# EAGLE board linearSensor (EAGLE 7.3.0)
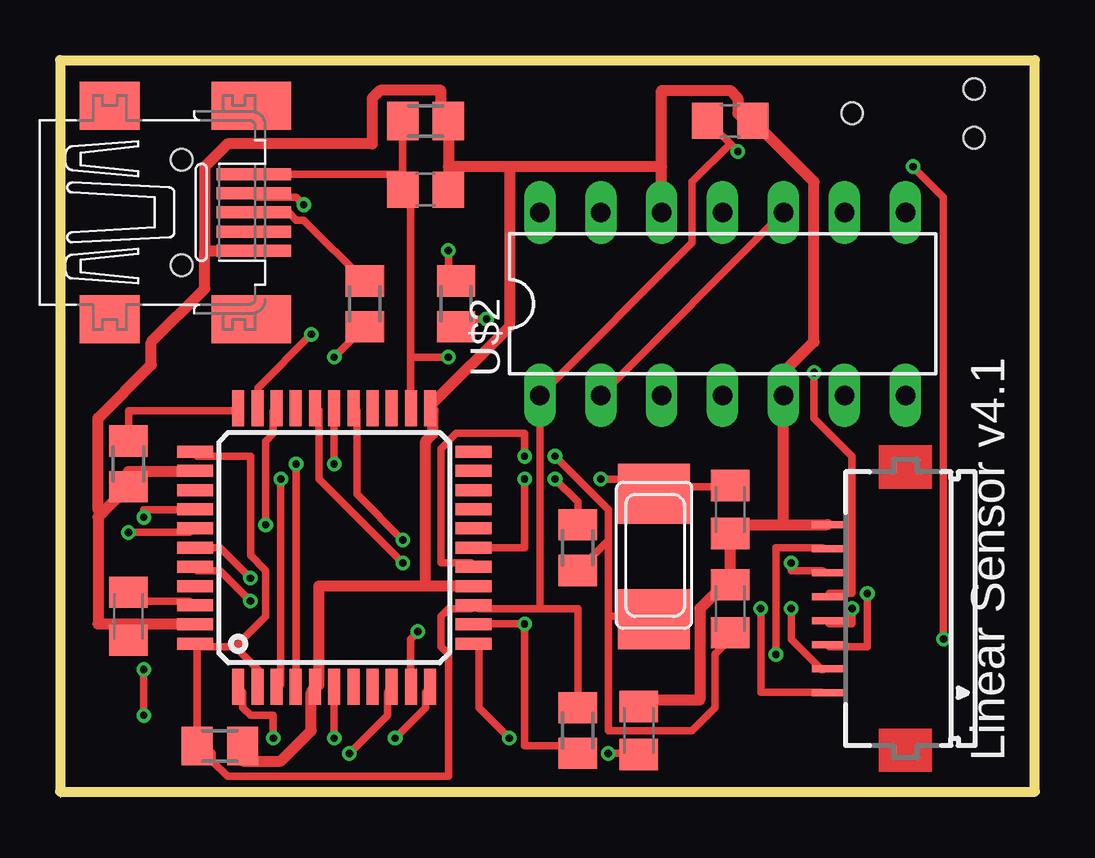
[diagram p0: board, top side]
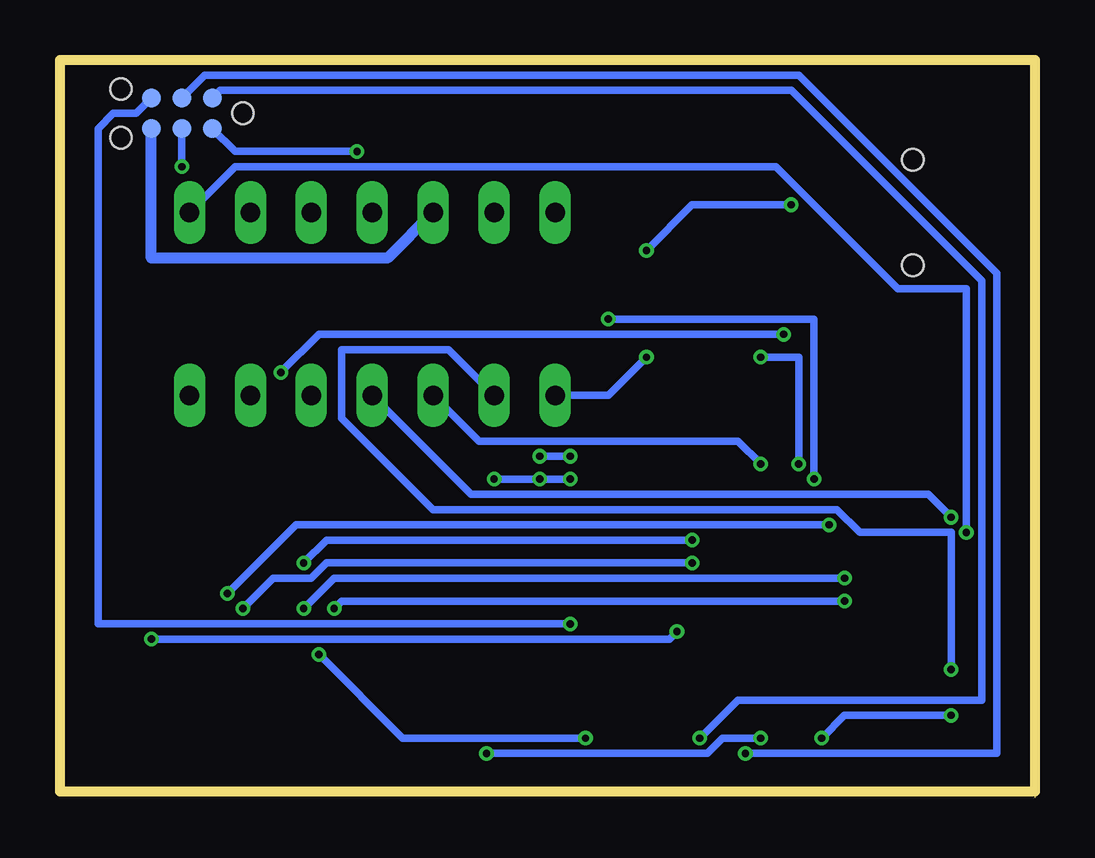
[diagram p1: board, bottom side, seen from below]

Size 40.64 x 30.73 mm. Coordinates in mm from the lower left corner, seen from the top.
Outline: 0,0.25 0,0
Outline: 0,0.25 0,30.73 40.64,30.73 40.64,0.25 0,0.25
Copper layers (1*16): Top 0.035mm / dielectric 1.5mm / Bottom 0.035mm
Design rules "Fusion_eagle_rule_v1.1": minimum track width 6mil, minimum drill 12mil, track to track 6mil, track to pad 6mil, pad to pad 6mil, via to via 6mil, smd to smd 0mil, copper to edge 10mil, drill to drill 10mil, minimum pad ring 10mil, minimum via ring 6mil, stop-mask expansion 2mil, vias tented up to drill 100mil, thermal gap 10mil
Net classes: 0 default: width 0.305 mm; 1 power: width 0.457 mm; 2 VIN: width 0.457 mm; 3 fine: width 0.305 mm; 4 aref: width 0.305 mm
vRestrict: area 3.8,2.8 to 19.1,6.6; area 3.8,2.8 to 7.6,16.8; area 15.2,5.3 to 19.1,18; area 3.8,14.2 to 19.1,18

## Footprints (pad centres in the part's own frame; a part is rotated, then mirrored left to right if it is on the bottom)
C0805K = smd 1.3 x 1.6: 1 -1,0; 2 1,0
C0805 = smd 1.3 x 1.5: 1 -0.95,0; 2 0.95,0
M0805 = smd 1.3 x 1.6: 1 -0.95,0; 2 0.95,0
TC2030-MCP-NL = smd 0.787 x 0.787: 5V 1.27,0.635; GND 3.81,0.635; MISO 1.27,-0.635; MOSI 2.54,0.635; RESET 3.81,-0.635; SCK 2.54,-0.635 | hole 0.889: 0,0; 5.08,-1.016; 5.08,1.016
DIL14 = drill 0.813 long: 1 -7.62,-3.81; 2 -5.08,-3.81; 3 -2.54,-3.81; 4 0,-3.81; 5 2.54,-3.81; 6 5.08,-3.81; 7 7.62,-3.81; 8 7.62,3.81; 9 5.08,3.81; 10 2.54,3.81; 11 0,3.81; 12 -2.54,3.81; 13 -5.08,3.81; 14 -7.62,3.81
TQFP44 = smd 1.5 x 0.5: 1 -5.8,4; 2 -5.8,3.2; 3 -5.8,2.4; 4 -5.8,1.6; 5 -5.8,0.8; 6 -5.8,0; 7 -5.8,-0.8; 8 -5.8,-1.6; 9 -5.8,-2.4; 10 -5.8,-3.2; 11 -5.8,-4; 23 5.8,-4; 24 5.8,-3.2; 25 5.8,-2.4; 26 5.8,-1.6; 27 5.8,-0.8; 28 5.8,0; 29 5.8,0.8; 30 5.8,1.6; 31 5.8,2.4; 32 5.8,3.2; 33 5.8,4 | smd 0.5 x 1.5: 12 -4,-5.8; 13 -3.2,-5.8; 14 -2.4,-5.8; 15 -1.6,-5.8; 16 -0.8,-5.8; 17 0,-5.8; 18 0.8,-5.8; 19 1.6,-5.8; 20 2.4,-5.8; 21 3.2,-5.8; 22 4,-5.8; 34 4,5.8; 35 3.2,5.8; 36 2.4,5.8; 37 1.6,5.8; 38 0.8,5.8; 39 0,5.8; 40 -0.8,5.8; 41 -1.6,5.8; 42 -2.4,5.8; 43 -3.2,5.8; 44 -4,5.8
FH12-08S-1SH = smd 0.3 x 1.3: 1 -3.5,3.25; 2 -2.5,3.25; 3 -1.5,3.25; 4 -0.5,3.25; 5 0.5,3.25; 6 1.5,3.25; 7 2.5,3.25; 8 3.5,3.25
NX6035 = smd 2.5 x 3: P$1 2.665,0; P$2 -2.565,0
32005-201 = smd 3.1 x 0.5: 1 3,1.6; 2 3,0.8; 3 3,0; 4 3,-0.8; 5 3,-1.6 | smd 2.5 x 2: M1 -3,-4.45; M2 -3,4.45 | smd 3.3 x 2: M3 2.9,4.45; M4 2.9,-4.45 | hole 0.9: 0,2.2; 0,-2.2

## Placement (x,y rotation side)
C2  22pF  [C0805K]  27.94,7.87 270 top
C3  100nF  [C0805K]  24.13,2.79 270 top
C4  100nF  [C0805]  27.94,28.19 180 top
C7  10uF  [C0805]  15.24,25.34 180 top
C8  22pF  [C0805K]  27.94,12 90 top
C10  10uF  [M0805]  15.24,28.19 180 top
C11  100nF  [C0805K]  2.86,7.56 270 top
C12  100nF  [M0805]  6.67,2.16 180 top
CON1  SPI  [TC2030-MCP-NL]  33.02,28.51 180 bottom
R3  10k  [M0805]  2.86,13.91 90 top
R13  1M  [M0805]  21.59,10.41 90 top
R15  10k  [M0805]  21.59,2.79 90 top
R24  22  [M0805]  12.7,20.57 90 top
R31  22  [M0805]  16.51,20.57 90 top
U$2  TSL1402R  [DIL14]  27.62,20.57 0 top
U$4  32U4  [TQFP44]  11.43,10.41 90 top
X1  FH12-08S-1SH  [FH12-08S-1SH]  35.24,7.87 90 top
X3  16MHz  [NX6035]  24.77,10.1 270 top
X4  MINI-USB  [32005-201]  5.08,24.38 0 top

## Library data of the parts
C2-C4 C7 C8 C10-C12 R13 R24 R31 = rcl
CON1 U$2 X3 = lpatiny
R3 R15 = resistor
U$4 = adafruit
X1 = con-hirose; OC_FARNELL: unknown; OC_NEWARK: unknown
X4 = con-cypressindustries; OC_FARNELL: unknown; OC_NEWARK: unknown

## Nets
+5V/1 [fine]: C4.2 C7.2 C10.2 C12.2 CON1.5V R15.2 U$2.1 U$4.2 U$4.14 U$4.24 U$4.34 U$4.44 X4.1
A0: U$4.36
A1: U$2.4 U$4.37
A2: U$2.8 U$4.38
A3: U$4.39 X1.2
A4: U$4.40 X1.1
A5: U$4.41
AREF: C11.1 U$4.42
CS: U$4.25
D5*: U$4.31 X1.3
D6*: U$4.27 X1.6
D7*: U$2.2 U$2.10 U$4.1
D8*: U$2.3 U$4.28
D9*: U$4.29 X1.4
D10*: U$4.30
D11*: U$4.12 X1.7
D12*: U$4.26
D13*: U$4.32 X1.5
D+USB: R24.2 X4.3
D-USB: R31.2 X4.2
GND [power]: C2.1 C3.1 C4.1 C7.1 C8.1 C10.1 C11.2 C12.1 CON1.GND R3.1 U$2.5 U$2.12 U$4.5 U$4.15 U$4.23 U$4.35 U$4.43 X1.8 X4.5
HWB: R3.2 U$4.33
MISO: CON1.MISO U$4.11
MOSI: CON1.MOSI U$4.10
N$16: C3.2 U$4.6
N$42: C8.2 R13.2 U$4.17 X3.P$2
RD+: R24.1 U$4.4
RD-: R31.1 U$4.3
RESET: CON1.RESET R15.1 U$4.13
RX: U$4.20
RXLED: U$4.8
SCK: CON1.SCK U$4.9
SCL: U$4.18
SDA: U$4.19
TX: U$4.21
TXLED: U$4.22
VUSB: U$4.7
XTAL1: C2.2 R13.1 U$4.16 X3.P$1

## Tracks (layer width: path | path; a pad name or v marks a point on that pad's centre or on a via)
+5V/1  (via drill 0.3)
  Top 0.305: 14.29,25.97 C10.2 | 14.29,25.97 C7.2 | 14.61,18.35 14.61,25.34 C7.2 | 14.61,18.35 14.61,16.45 U$4.24 | 14.29,25.97 8.26,25.97 X4.1 | 14.29,25.97 C7.2 | 7.3,6.29 8.26,5.33 8.26,4.7 U$4.2 | 5.71,6.29 7.3,6.29 | 7.3,6.29 8.57,7.56 8.57,9.46 7.94,10.1 7.94,14.22 5.71,14.22 U$4.34 | 5.71,6.29 C12.2 6.03,2.16 6.35,1.84 6.35,1.52 6.99,0.89 16.19,0.89 16.19,5.97 15.88,6.29 15.88,7.56 16.19,7.87 17.14,7.87 U$4.14 17.46,7.87 20,7.87 | 5.71,6.29 U$4.44 | 27.94,27.24 27.3,27.88 27.3,28.19 C4.2 | 27.94,27.24 v28.26,26.92 | 20,7.87 21.59,7.87 R15.2 | 20,7.87 U$2.1 26.35,23.11 26.35,25.65 27.94,27.24 | v16.19,18.35 14.61,18.35
  Bottom 0.305: CON1.5V 33.34,26.92 v28.26,26.92 | v16.19,18.35 17.78,16.76 U$2.1
A1  (via drill 0.3)
  Top 0.305: v3.49,11.68 3.49,12 5.4,12 U$4.37
  Bottom 0.305: v3.49,11.68 4.45,12.64 23.5,12.64 U$2.4
A2  (via drill 0.3)
  Top 0.305: v2.86,11.05 5.4,11.05 U$4.38
  Bottom 0.305: v2.86,11.05 2.86,21.21 5.71,21.21 10.79,26.29 33.34,26.29 U$2.8
A3  (via drill 0.3)
  Top 0.305: v30.48,7.87 30.48,6.6 31.75,5.33 X1.2 | v7.94,9.14 6.67,10.41 U$4.39
  Bottom 0.305: v30.48,7.87 29.21,9.14 v7.94,9.14
A4  (via drill 0.3)
  Top 0.305: v29.21,7.87 29.21,4.38 31.75,4.38 X1.1 | v7.94,8.19 6.67,9.46 5.71,9.46 U$4.40
  Bottom 0.305: v29.21,7.87 28.89,8.19 v7.94,8.19
AREF
  Top 0.305: C11.1 2.86,8.19 5.4,8.19 U$4.42
D5*  (via drill 0.3)
  Top 0.305: v33.66,8.51 33.66,6.29 32.07,6.29 X1.3 | v8.57,11.37 8.57,14.86 8.89,15.18 8.89,16.13 U$4.31
  Bottom 0.305: v33.66,8.51 30.8,11.37 v8.57,11.37
D6*  (via drill 0.3)
  Top 0.305: v30.48,9.78 30.48,9.46 31.75,9.46 X1.6 | v14.29,10.73 12.38,12.64 12.38,16.13 U$4.27
  Bottom 0.305: v30.48,9.78 29.53,10.73 v14.29,10.73
D7*  (via drill 0.3)
  Top 0.305: v8.89,2.48 8.89,3.43 7.94,3.43 7.62,3.75 7.62,4.38 U$4.1 | v3.49,5.33 v3.49,3.43 | U$2.2 U$2.10
  Bottom 0.305: v8.89,2.48 7.94,3.43 v3.49,3.43 | v3.49,5.33 3.49,11.05 7.3,11.05 8.26,12 25.08,12 28.89,15.81 28.89,18.67 24.45,18.67 U$2.2
D8*  (via drill 0.3)
  Top 0.305: v11.43,13.91 U$4.28
  Bottom 0.305: v11.43,13.91 12.38,14.86 23.18,14.86 U$2.3
D9*  (via drill 0.3)
  Top 0.305: v33.02,7.87 33.02,7.24 32.07,7.24 X1.4 | v14.29,9.78 10.79,13.27 10.79,16.13 U$4.29
  Bottom 0.305: v33.02,7.87 31.75,9.14 30.16,9.14 29.53,9.78 v14.29,9.78
D11*  (via drill 0.3)
  Top 0.305: v29.84,5.97 29.84,10.41 31.75,10.41 X1.7 | v18.73,2.48 17.46,3.75 17.46,6.29 U$4.12
  Bottom 0.305: v29.84,5.97 26.35,2.48 v18.73,2.48
D13*  (via drill 0.3)
  Top 0.305: v31.43,17.72 31.43,15.81 33.02,14.22 33.02,8.51 32.07,8.51 X1.5 | v10.48,19.3 8.26,17.08 8.26,16.45 U$4.32
  Bottom 0.305: v31.43,17.72 29.84,19.3 v10.48,19.3
D+USB
  Top 0.305: X4.3 9.53,24.38 9.84,24.07 10.16,24.07 R24.2
D-USB  (via drill 0.3)
  Top 0.305: v16.19,22.8 16.19,21.84 R31.2 | v10.16,24.7 9.84,25.02 8.26,25.02 X4.2
  Bottom 0.305: v16.19,22.8 14.29,24.7 v10.16,24.7
GND
  Top 0.457: 30.16,11.37 27.94,11.37 C8.1 27.94,9.14 | 30.16,11.37 31.75,11.37 X1.8 | 27.94,9.14 26.67,7.87 26.67,4.06 24.13,4.06 C3.1 | 27.94,9.14 C2.1 | 30.16,11.37 U$2.5 30.16,17.72 31.43,18.99 31.43,25.65 C4.1 28.57,28.19 28.26,28.51 28.26,29.15 27.94,29.46 25.08,29.46 25.08,26.29 | 2.86,7.24 5.4,7.24 U$4.43 | C11.2 2.86,7.24 | U$4.35 5.4,13.59 2.86,13.59 R3.1 1.75,11.84 | 2.86,7.24 1.59,7.24 1.59,11.68 1.75,11.84 | 6.03,22.8 7.94,22.8 X4.5 | 6.03,22.8 6.03,21.21 3.81,18.99 3.81,18.03 1.59,15.81 1.59,12 1.75,11.84 | C12.1 7.62,1.52 9.21,1.52 10.48,2.79 10.48,4.38 U$4.5 10.79,4.7 10.79,8.83 15.24,8.83 | 15.24,8.83 17.14,8.83 U$4.15 | 15.24,8.83 15.24,14.86 15.56,15.18 15.56,16.13 U$4.23 15.56,16.45 18.73,19.62 18.73,26.29 | 16.19,26.29 C10.1 15.88,28.19 15.88,29.46 13.34,29.46 13.02,29.15 13.02,27.24 6.99,27.24 6.03,26.29 6.03,22.8 | 16.19,26.29 C7.1 | 25.08,26.29 18.73,26.29 | 18.73,26.29 16.19,26.29 | U$2.12 25.08,26.29
  Bottom 0.457: CON1.GND 36.83,22.48 26.99,22.48 U$2.12
HWB
  Top 0.305: R3.2 2.86,16.13 7.3,16.13 U$4.33
MISO  (via drill 0.3)
  Top 0.305: v13.97,2.48 15.24,3.75 15.24,4.38 U$4.11
  Bottom 0.305: CON1.MISO 33.97,29.46 10.16,29.46 2.22,21.53 2.22,4.06 12.38,4.06 v13.97,2.48
MOSI  (via drill 0.3)
  Top 0.305: v35.56,26.29 36.83,25.02 v36.83,6.6 | v14.92,6.92 14.61,6.6 14.61,4.7 U$4.10
  Bottom 0.305: v35.56,26.29 CON1.MOSI | v36.83,6.6 15.24,6.6 v14.92,6.92
N$16  (via drill 0.3)
  Top 0.305: v11.43,2.48 U$4.6 | v22.86,1.84 24.13,1.84 C3.2
  Bottom 0.305: v11.43,2.48 13.02,2.48 13.65,1.84 v22.86,1.84
N$42  (via drill 0.3)
  Top 0.305: U$4.17 19.37,10.41 v19.37,13.27 | v20.64,13.27 21.59,12.32 R13.2 | 24.77,12.95 27.94,12.95 C8.2 | v22.54,13.27 24.77,13.27 24.77,12.95 | 24.77,12.95 X3.P$2
  Bottom 0.305: v19.37,13.27 v20.64,13.27 v22.54,13.27
RD+  (via drill 0.3)
  Top 0.305: v9.84,13.91 9.84,4.7 U$4.4 | v11.43,18.35 R24.1
  Bottom 0.305: v9.84,13.91 9.84,18.35 v11.43,18.35
RD-  (via drill 0.3)
  Top 0.305: v9.21,13.27 9.21,4.7 U$4.3 | v17.78,19.94 16.51,19.94 R31.1
  Bottom 0.305: v9.21,13.27 9.21,19.94 v17.78,19.94
RESET  (via drill 0.3)
  Top 0.305: U$4.13 17.46,7.24 v19.37,7.24 19.37,2.16 21.59,2.16 R15.1
  Bottom 0.305: CON1.RESET 37.47,28.51 38.42,28.51 39.05,27.88 39.05,7.24 v19.37,7.24
SCK  (via drill 0.3)
  Top 0.305: v12.06,1.84 13.65,3.43 13.65,4.38 U$4.9
  Bottom 0.305: CON1.SCK 34.61,30.1 9.84,30.1 1.59,21.84 1.59,1.84 v12.06,1.84
XTAL1  (via drill 0.3)
  Top 0.305: v19.37,14.22 19.37,15.18 16.51,15.18 15.88,14.54 15.88,9.78 17.14,9.78 U$4.16 | v20.64,14.22 22.86,12 22.86,10.73 | 22.86,10.73 R13.1 | 22.86,10.73 22.86,7.56 | 22.86,7.56 22.86,2.79 26.35,2.79 27.3,3.75 27.3,5.97 27.94,6.6 C2.2 | 22.86,7.56 24.77,7.56 X3.P$1
  Bottom 0.305: v20.64,14.22 v19.37,14.22

## Text on the board
tPlace: Linear Sensor v4.1
203bmp: C:/Users/G/Pictures/logo_epfl.bmp